# Altium PCB SuperMiniCar.PcbDoc
Units mm, origin at the board's own origin, x right, y up, seen from the top; angles counter-clockwise.
Board outline 97.78 x 108.4 mm, 2 copper layers (Top Layer, Bottom Layer); 77 components, 69 nets, 267 pads, 115 vias.
Unrouted connection lines stored in the file: 20.
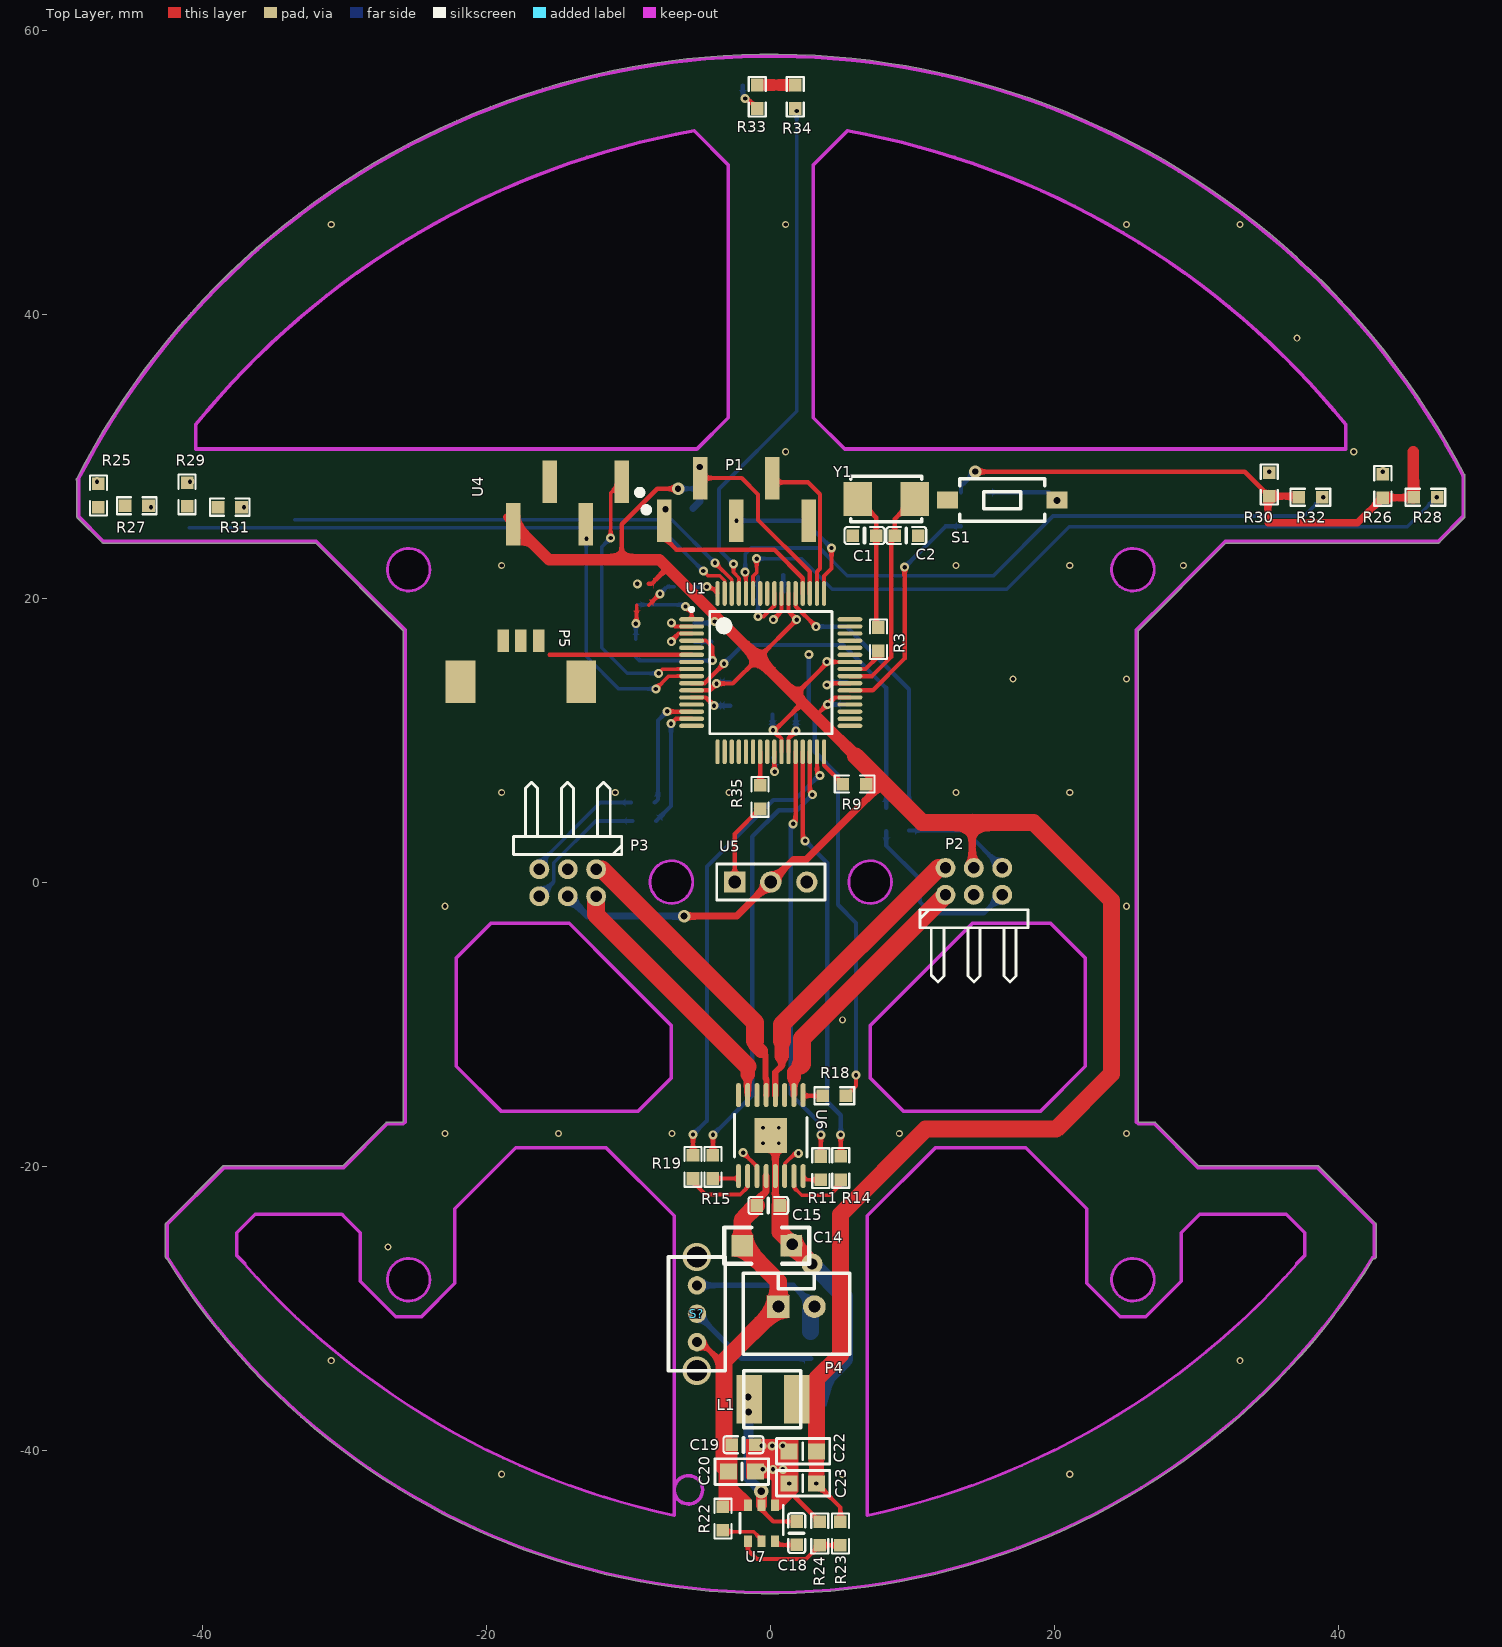
[diagram p0: Top Layer view]
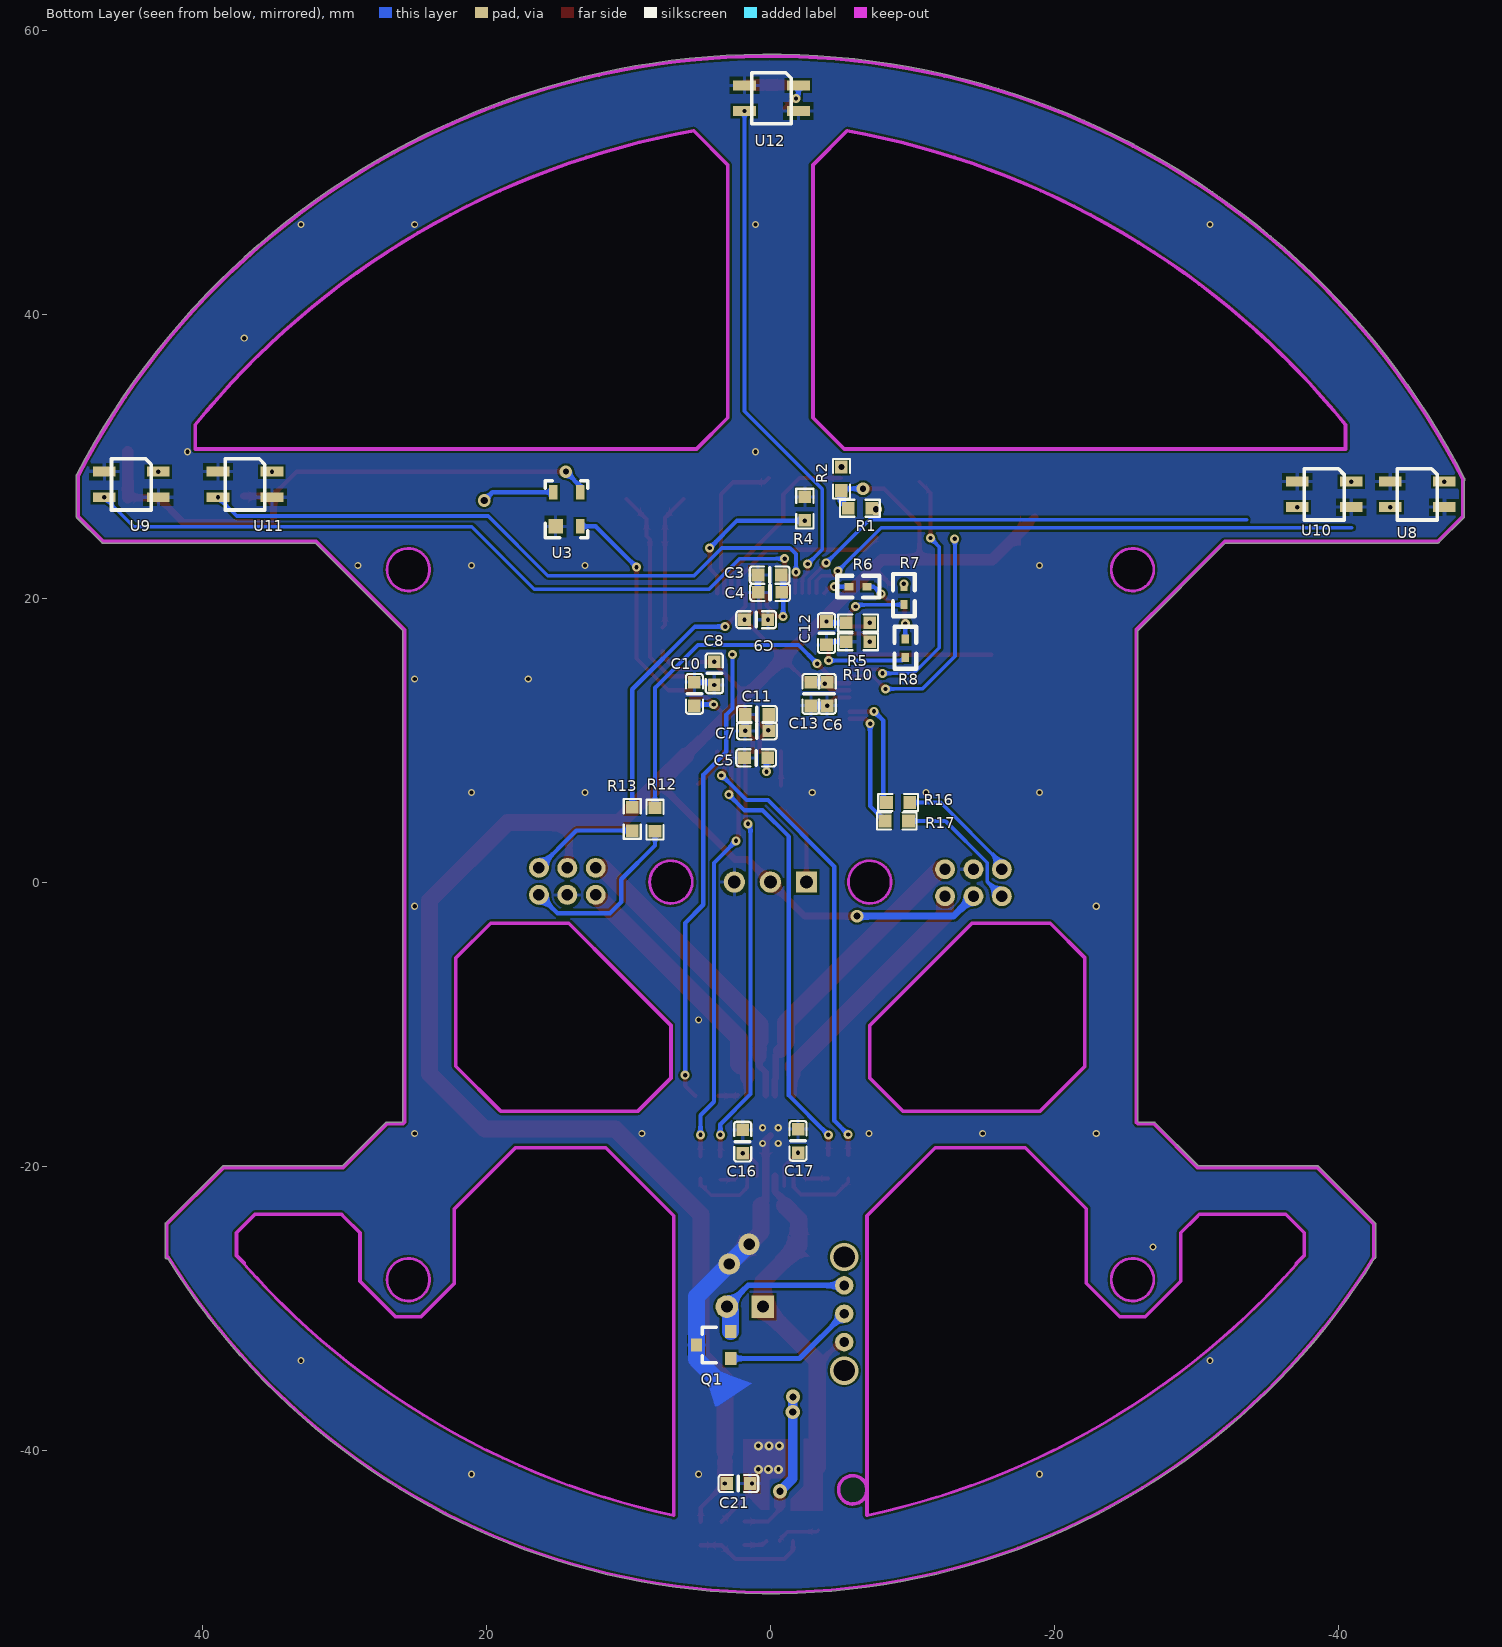
[diagram p1: Bottom Layer view, seen from below]
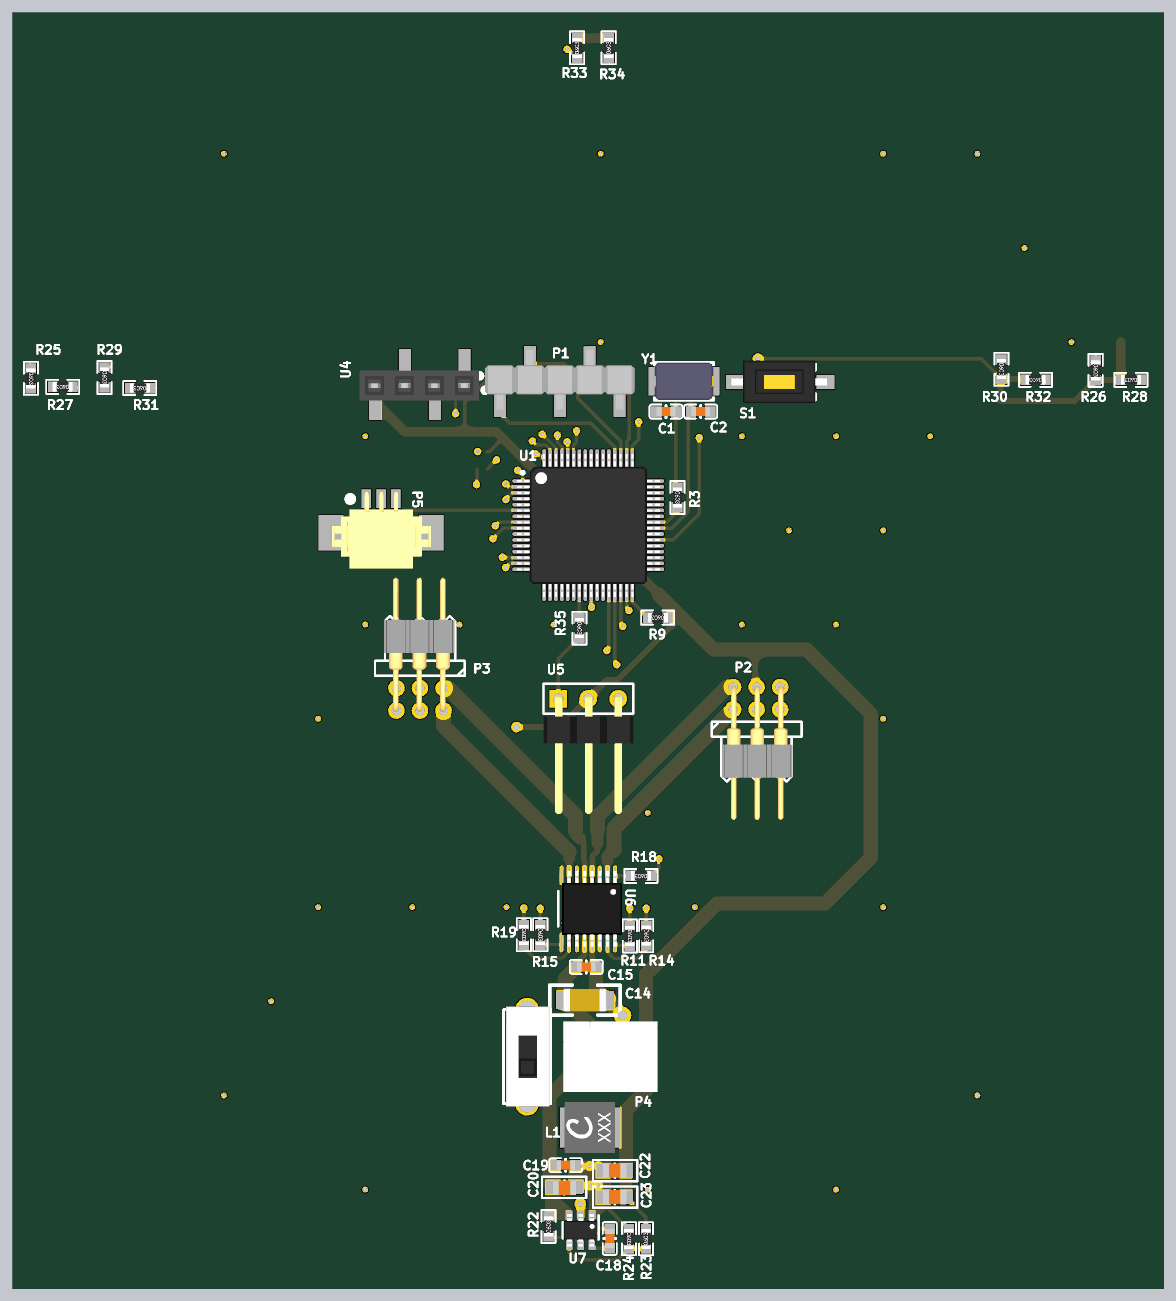
[diagram p2: 3D render of the assembled board from above, using the file's embedded part models]
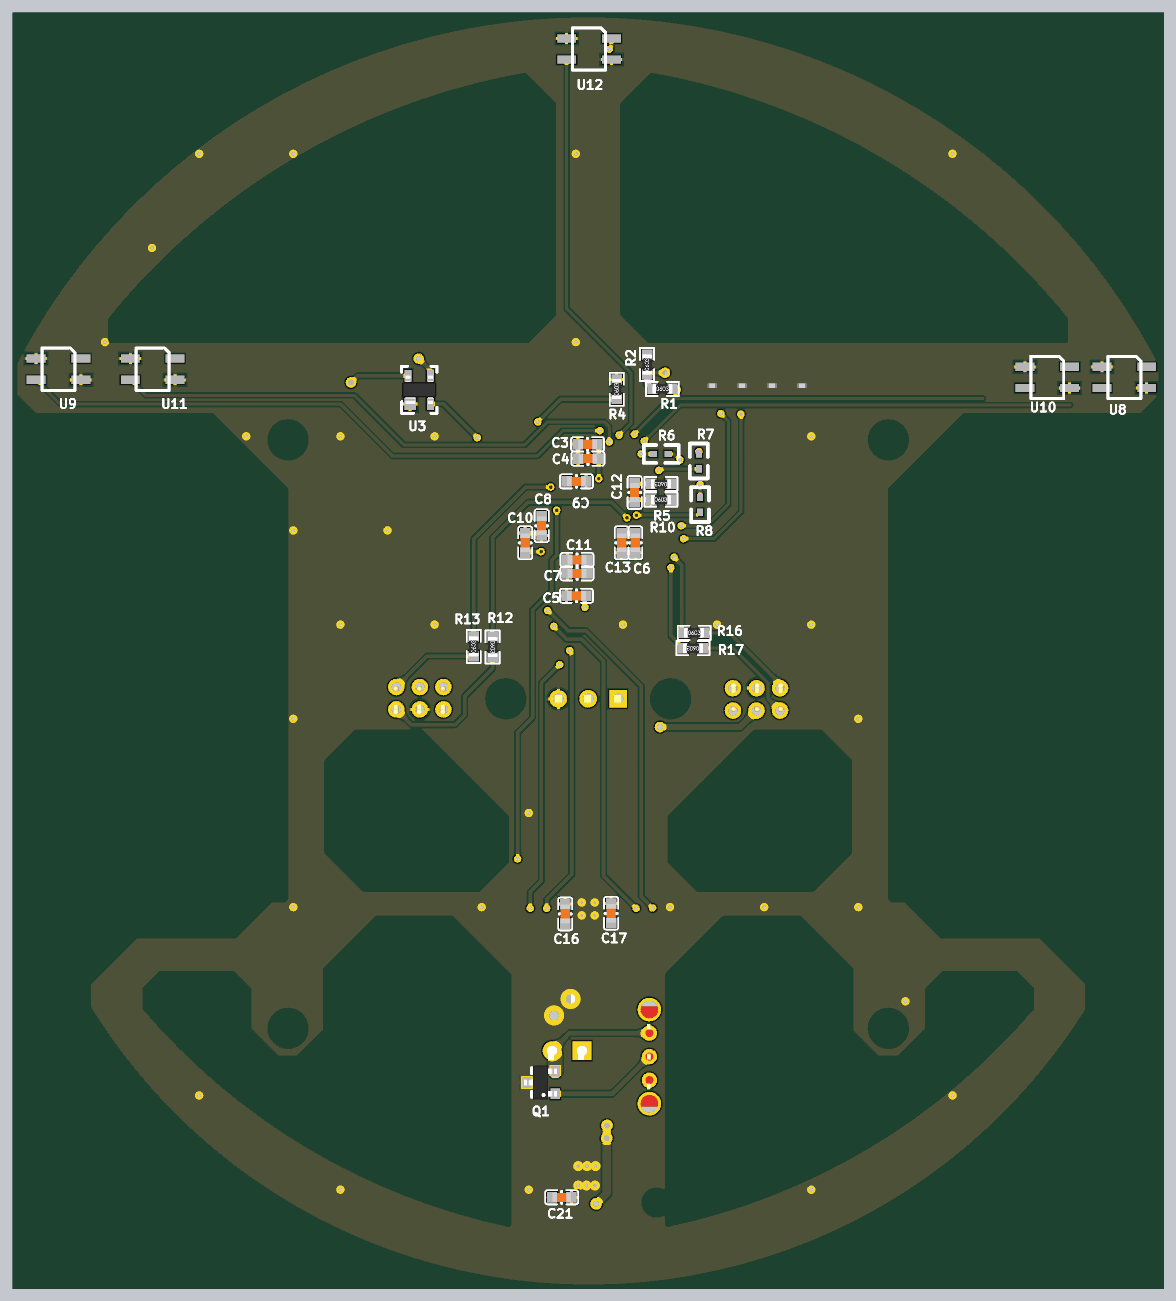
[diagram p3: 3D render of the assembled board from below, using the file's embedded part models]

## Layer stack, top to bottom
Top Solder: solder mask 0.0102, Solder Resist, Dk 3.5
Top Layer: signal copper 0.0356
Dielectric 1: dielectric 0.32, FR-4, Dk 4.8
Bottom Layer: signal copper 0.0356
Bottom Solder: solder mask 0.0102, Solder Resist, Dk 3.5

## Board outline
-42.627,-26.4 -42.627,-24.1 cw(c-42.5,-24.1) -42.59,-24.009 -42.59,-24.01 -38.59,-20.01 cw(c-38.5,-20.1) -38.5,-19.973 -30.128,-19.973 -27.09,-16.935 cw(c-27,-17.025) -27,-16.898 -25.928,-16.898 -25.877,-16.847 -25.877,17.697 -32.053,23.873 -47,23.873 cw(c-47,24) -47.091,23.91 -47.09,23.91 -48.84,25.66 -48.84,25.659 cw(c-48.75,25.75) -48.877,25.75 -48.877,28.26 cw(c-48.778,28.339) -48.891,28.397 cw(c0.058,3.272) 48.851,28.701 cw(c48.75,28.623) 48.877,28.623 48.877,25.75 cw(c48.75,25.75) 48.84,25.659 48.84,25.66 47.09,23.91 47.091,23.91 cw(c47,24) 47,23.873 32.053,23.873 25.877,17.697 25.877,-16.847 25.928,-16.898 27,-16.898 cw(c27,-17.025) 27.09,-16.935 30.128,-19.973 38.5,-19.973 cw(c38.5,-20.1) 38.59,-20.01 42.59,-24.01 42.59,-24.009 cw(c42.5,-24.1) 42.627,-24.1 42.627,-26.4 cw(c42.5,-26.4) 42.446,-26.516 cw(c-0.05,-0.055) -42.544,-26.52 cw(c-42.5,-26.4)
cut-out: -40.5,30.5 -40.5,32.207 cw(c4.87,-4.636) -5.4,52.9 -3,50.5 -3,32.7 -5.2,30.5
cut-out: 3,32.7 5.2,30.5 40.5,30.5 40.5,32.207 ccw(c-4.87,-4.636) 5.4,52.9 3,50.5
cut-out: 24,-28 ccw(c25.5,-28) 25.5,-29.5 ccw(c25.5,-28) 27,-28 ccw(c25.5,-28) 25.5,-26.5 ccw(c25.5,-28)
cut-out: 22.25,-28.25 24.6,-30.6 26.4,-30.6 28.9,-28.1 28.9,-24.7 30.2,-23.4 36.3,-23.4 37.6,-24.7 37.6,-26.3 37.04,-26.86 37.064,-26.885 cw(c-4.84,9.994) 6.8,-44.6 6.8,-23.5 11.6,-18.7 17.95,-18.7 22.25,-23
cut-out: -37.04,-26.86 -37.6,-26.3 -37.6,-24.7 -36.3,-23.4 -30.2,-23.4 -28.9,-24.7 -28.9,-28.1 -26.4,-30.6 -24.6,-30.6 -22.25,-28.25 -22.25,-23 -17.95,-18.7 -11.6,-18.7 -6.8,-23.5 -6.8,-44.6 cw(c4.84,9.994)
cut-out: -25.5,-29.5 cw(c-25.5,-28) -27,-28 cw(c-25.5,-28) -25.5,-26.5 cw(c-25.5,-28) -24,-28 cw(c-25.5,-28)
cut-out: 7,-13.8 9.325,-16.125 19,-16.125 22.15,-12.975 22.15,-5.35 19.7,-2.9 14.2,-2.9 7,-10.1
cut-out: -22.15,-12.975 -22.15,-5.35 -19.7,-2.9 -14.2,-2.9 -7,-10.1 -7,-13.8 -9.325,-16.125 -19,-16.125
cut-out: 24,22 ccw(c25.5,22) 25.5,20.5 ccw(c25.5,22) 27,22 ccw(c25.5,22) 25.5,23.5 ccw(c25.5,22)
cut-out: 5.47,0 ccw(c7,0) 7,-1.53 ccw(c7,0) 8.53,0 ccw(c7,0) 7,1.53 ccw(c7,0)
cut-out: -7,-1.503 cw(c-7,0) -8.503,0 cw(c-7,0) -7,1.503 cw(c-7,0) -5.497,0 cw(c-7,0)
cut-out: -25.5,20.5 cw(c-25.5,22) -27,22 cw(c-25.5,22) -25.5,23.5 cw(c-25.5,22) -24,22 cw(c-25.5,22)

## Design rules (kind name [scope] priority, off if disabled: settings)
Clearance [All] p1: gap=0.15
PolygonConnect PolygonConnect_1 [IsVia] p1: connectstyle=Direct reliefconductorwidth=0.254 reliefentries=4 polygonreliefangle="90 Angle" airgapwidth=0.254
PolygonConnect [All] p2: connectstyle=Relief reliefconductorwidth=0.254 reliefentries=4 polygonreliefangle="90 Angle" airgapwidth=0.254
RoomDefinition Sensor [InComponentClass('Sensor')] p1: confinementstyle=ConfineIn formatcopy=TRUE lockcomponents=FALSE outline -192,-72 158.7,-72 158.7,86.4 -192,86.4
RoomDefinition Power [InComponentClass('Power')] p2: confinementstyle=ConfineIn formatcopy=TRUE lockcomponents=FALSE outline -193.9,-75 122.1,-75 122.1,99 -193.9,99
RoomDefinition MotorDriver [InComponentClass('MotorDriver')] p3: confinementstyle=ConfineIn formatcopy=TRUE lockcomponents=FALSE outline -194.4,-84 96.9,-84 96.9,109.4 -194.4,109.4
RoomDefinition MCU [InComponentClass('MCU')] p4: confinementstyle=ConfineIn formatcopy=TRUE lockcomponents=FALSE outline -194.4,-80 236.9,-80 236.9,77.1 -194.4,77.1
RoutingVias [All] p1: holewidth=0.711 width=1.27 viastyle="Through Hole" minholewidth=0.711 minwidth=1.27 maxholewidth=0.711 maxwidth=1.27
SolderMaskExpansion [All] p1: expansion=0.102
Width [All] p1: maxlimit=2 minlimit=0.254 preferedwidth=0.254 minimp=50.000000 maximp=50.000000 favimp=50.000000
30 further rules are at their usual default settings.

## Classes and differential pairs
component class MCU: C1 C2 C3 C4 C5 C6 C7 C8 C9 C10 C11 C12 C13 P1 R1 R2 R3 R4 R5 R6 R7 R8 R9 R10 S1 U1 U3 U4 Y1
component class MotorDriver: C14 C15 C16 C17 P2 P3 R11 R12 R13 R14 R15 R16 R17 R18 R19 U6
component class Power: C18 C19 C20 C21 C22 C23 L1 P4 Q1 R22 R23 R24 S? U7
component class Sensor: P5 R25 R26 R27 R28 R29 R30 R31 R32 R33 R34 R35 U5 U8 U9 U10 U11 U12

## Components (designator, comment, footprint, x,y, rotation, side; value= is the part's Value field where it differs from the comment)
C1 "1uF/0603/50V" 0603C 6.6,24.4 r0 top
C2 "1uF/0603/50V" 0603C 9.55,24.4 r180 top
C3 "1uF/0603/50V" 0603C 0.05,21.625 r180 bottom
C4 "1uF/0603/50V" 0603C 0.025,20.4 r180 bottom
C5 "1uF/0603/50V" 0603C 1,8.75 r180 bottom
C6 "1uF/0603/50V" 0603C -4,13.25 r90 bottom
C7 "1uF/0603/50V" 0603C 0.95,10.65 r180 bottom
C8 "1uF/0603/50V" 0603C 3.95,14.7 r90 bottom
C9 "1uF/0603/50V" 0603C 1,18.475 r0 bottom
C10 "1uF/0603/50V" 0603C 5.35,13.25 r270 bottom
C11 "1uF/0603/50V" 0603C 0.95,11.8 r180 bottom
C12 "1uF/0603/50V" 0603C -3.95,17.525 r90 bottom
C13 "1uF/0603/50V" 0603C -2.85,13.25 r90 bottom
C14 "1uF/0603/50V" 1206 -2,-25.6 r0 top
C15 "1uF/0603/50V" 0603C -0.175,-22.775 r0 top
C16 "1uF/0603/50V" 0603C 1.95,-18.275 r90 bottom
C17 "1uF/0603/50V" 0603C -1.95,-18.225 r90 bottom
C18 "100nF" 0603C 1.825,-45.85 r90 top
C19 "100nF" 0603C -1.925,-39.625 r0 top
C20 "1uF/0603/50V" 0805 -2.025,-41.5 r180 top
C21 "100nF" 0603C 2.25,-42.35 r0 bottom
C22 "1uF/0603/50V" 0805 2.25,-40.1 r0 top
C23 "1uF/0603/50V" 0805 2.25,-42.35 r0 top
L1 "2.2uH" 4020L -1.15,-36.425 r0 top
P1 "TIVA C_Debug" SMT_HEADER5 -7.5,25.45 r0 top
P2 "Faulhaber_1524_L" HDR2X3_2.0Mm 14.3,0 r0 top
P3 "Faulhaber_1524_R" HDR2X3_2.0Mm -14.3,0 r180 top
P4 "Header 2" XH-2A 1.8,-29.9 r0 top
P5 "Header 3" A1.25WF-3P -17.6,17 r0 top
Q1 "NMOS_3p" SOT-23 2.8,-32.6 r90 bottom
R1 "1K/5%" 0603R -6.3,26.325 r180 bottom
R2 "1K/5%" 0603R -5,28.4 r90 bottom
R3 "1K/5%" 0603R 7.575,17.1 r270 top
R4 "1K/5%" 0603R -2.425,26.3 r90 bottom
R5 "1K/5%" 0603R -6.175,18.25 r0 bottom
R6 "1K/5%" 0402 -6.8,20.8 r0 bottom
R7 "1K/5%" 0402 -9.4,20.8 r270 bottom
R8 "1K/5%" 0402 -9.5,17.1 r270 bottom
R9 "1K/5%" 0603R 5.9,6.9 r180 top
R10 "1K/5%" 0603R -6.175,16.925 r180 bottom
R11 "33R" 0603R 3.525,-20.15 r270 top
R12 "1K/5%" 0603R 8.125,4.4 r270 bottom
R13 "510" 0603R 9.725,4.45 r90 bottom
R14 "33R" 0603R 4.925,-20.125 r270 top
R15 "33R" 0603R -4.075,-20.05 r270 top
R16 "1K/5%" 0603R -9,5.6 r180 bottom
R17 "1K/5%" 0603R -8.9,4.3 r0 bottom
R18 "1k" 0603R 4.475,-15.05 r180 top
R19 "33R" 0603R -5.475,-20.05 r270 top
R22 "10k" 0603R -3.375,-44.825 r90 top
R23 "54.9K" 0603R 4.9,-45.875 r90 top
R24 "1K" 0603R 3.45,-45.875 r270 top
R25 "220" 0603R -47.35,27.225 r270 top
R26 "220" 0603R 43.1,27.9 r270 top
R27 "7.5k" 0603R -44.65,26.5 r180 top
R28 "7.5k" 0603R 46.1,27.1 r180 top
R29 "220" 0603R -41.1,27.3 r270 top
R30 "220" 0603R 35.1,28 r270 top
R31 "7.5k" 0603R -38.1,26.4 r180 top
R32 "7.5k" 0603R 38,27.1 r180 top
R33 "220" 0603R -0.95,55.3 r90 top
R34 "7.5k" 0603R 1.725,55.3 r90 top
R35 "1K/5%" 0603R -0.75,6 r270 top
S1 "KEY" SW-3x6mm-SMT 16.3,26.9 r180 top
S? "slide switch" "Slide Switch" -5.2,-30.4 r90 top
U1 "TM4C123FH6PM" LQFP_64 0,14.75 r0 top
U3 "IMP811" SOT143 14.35,26.25 r180 bottom
U4 "Bluetooth" "SMT_Female HEADER4" -10.5,28.2 r180 top
U5 "Servo" HDR1X3 -2.54,0 r0 top
U6 "DRV8848PWP" HSSOP_N 0,-17.85 r270 top
U7 "TPS564201DDCR" SOT-23thin_L -0.65,-45.15 r270 top
U8 "ITR8307-TR8" SOP-4 -45.55,27.3 r0 bottom
U9 "ITR8307-TR8" SOP-4 45,28 r0 bottom
U10 "ITR8307-TR8" SOP-4 -39,27.3 r0 bottom
U11 "ITR8307-TR8" SOP-4 37,28 r0 bottom locked
U12 "ITR8307-TR8" SOP-4 -0.075,55.2 r0 bottom
Y1 "XTAL" NX5032GA 8.125,26.975 r180 top

## Footprints (in the part's own frame and the unit in brackets; to place one, negate y for a bottom-side part, rotate by r counter-clockwise, add the part's x,y. Pads: shape width x height; smd on the part's side, far side on the other; paste and mask are expansions set on the pad)
0402 [mil]
  rect 25x20 smd: 1(0,0) 2(50,0)
  silkscreen extent -35,-30 82,30
0603C [mil]
  rect 35x35 smd: 1(-32.5,0) 2(32.5,0)
  silkscreen extent -55,-24 55,24, body extent -31,-16 31,16, height 20
0603R [mil]
  rect 35x35 smd: 1(-32.5,0) 2(32.5,0)
  silkscreen extent -55,-24 55,24, body extent -33,-16 33,16, height 22
0805 [mm]
  rect 1.2x1.14 smd: 1(-0.955,0) 2(0.955,0)
  silkscreen extent -1.85,-0.89 1.91,0.91, body extent -1,-0.6 1,0.65, height 0.8
1206 [mil]
  rect 60x60 smd: 1(0,0) 2(135,0)
  silkscreen extent -50,-50 185,50, body extent -6,-38 140,38, height 69
4020L [mm]
  rect 1.8x3.4 smd: 1(-0.375,0) 2(2.975,0)
  silkscreen extent -0.75,-2 3.25,2, body extent -0.88,-2.15 3.42,2.15, height 2.1
A1.25WF-3P [mm]
  rect 2.1x3 smd: 0(-4.25,-2.9) 0(4.25,-2.9)
  round 1 on Top Overlay: 0(-2.625,-0.03)
  rect 0.8x1.6 smd: 1(-1.25,0) 2(0,0) 3(1.25,0)
  body extent -4.18,-5.93 4.23,0.58, height 3.58
HDR1X3 [mm] "Connector; Header; 3 Position"
  rect 1.5x1.5 hole 0.9: 1(0,0)
  round 1.5 hole 0.9: 2(2.54,0) 3(5.08,0)
  silkscreen extent -1.27,-1.27 6.35,1.27, body extent -1.25,-9.79 6.37,0.34, height 2.51
HDR2X3_2.0Mm [mm]
  round 1.4 hole 0.8: 1(-2,-0.9) 2(-2,1) 3(0,-0.9) 4(0,1) 5(2,-0.9) 6(2,1)
  silkscreen extent -3.8,-7.03 3.82,-1.95, body extent -2.95,-10.3 3.05,1.1, height 4
HSSOP_N [mm]
  oval 1.7x0.35 smd paste-0.102 mask+0.051: 1(-2.85,2.275) 2(-2.85,1.625) 3(-2.85,0.975) 4(-2.85,0.325) 5(-2.85,-0.325) 6(-2.85,-0.975) 7(-2.85,-1.625) 8(-2.85,-2.275) 9(2.85,-2.275) 10(2.85,-1.625) 11(2.85,-0.975) 12(2.85,-0.325) 13(2.85,0.325) 14(2.85,0.975) 15(2.85,1.625) 16(2.85,2.275)
  rect 2.46x2.31 smd paste-0.102 mask+0.051: 17(0,0)
  silkscreen extent -1.5,-2.55 1.5,2.55, body extent -3.2,-2.22 3.2,2.88, height 1.2
LQFP_64 [mm]
  oval 1.75x0.3 smd: 1(-5.575,3.75) 2(-5.575,3.25) 3(-5.575,2.75) 4(-5.575,2.25) 5(-5.575,1.75) 6(-5.575,1.25) 7(-5.575,0.75) 8(-5.575,0.25) 9(-5.575,-0.25) 10(-5.575,-0.75) 11(-5.575,-1.25) 12(-5.575,-1.75) 13(-5.575,-2.25) 14(-5.575,-2.75) 15(-5.575,-3.25) 16(-5.575,-3.75) 33(5.575,-3.75) 34(5.575,-3.25) 35(5.575,-2.75) 36(5.575,-2.25) 37(5.575,-1.75) 38(5.575,-1.25) 39(5.575,-0.75) 40(5.575,-0.25) 41(5.575,0.25) 42(5.575,0.75) 43(5.575,1.25) 44(5.575,1.75) 45(5.575,2.25) 46(5.575,2.75) 47(5.575,3.25) 48(5.575,3.75)
  oval 0.3x1.75 smd: 17(-3.75,-5.575) 18(-3.25,-5.575) 19(-2.75,-5.575) 20(-2.25,-5.575) 21(-1.75,-5.575) 22(-1.25,-5.575) 23(-0.75,-5.575) 24(-0.25,-5.575) 25(0.25,-5.575) 26(0.75,-5.575) 27(1.25,-5.575) 28(1.75,-5.575) 29(2.25,-5.575) 30(2.75,-5.575) 31(3.25,-5.575) 32(3.75,-5.575) 49(3.75,5.575) 50(3.25,5.575) 51(2.75,5.575) 52(2.25,5.575) 53(1.75,5.575) 54(1.25,5.575) 55(0.75,5.575) 56(0.25,5.575) 57(-0.25,5.575) 58(-0.75,5.575) 59(-1.25,5.575) 60(-1.75,5.575) 61(-2.25,5.575) 62(-2.75,5.575) 63(-3.25,5.575) 64(-3.75,5.575)
  silkscreen extent -5.7,-4.3 4.3,4.57, body extent -6.07,-6.08 6.07,6.06, height 1.62
NX5032GA [mm] "贴片晶振，5mm x 3.2mm"
  rect 2x2.4 smd: 1(-2,0) 2(2,0)
  silkscreen extent -2.5,-1.6 2.5,1.6, body extent -2.5,-1.6 2.5,1.6, height 1.3
"Slide Switch" [mm]
  round 1.3 hole 0.7: 1(-2,0) 2(0,0) 3(2,0)
  silkscreen extent -4,-2 4,2, body extent -4.25,-1.9 4.25,1.8, height 6.5
"SMT_Female HEADER4" [mm]
  rect 1.02x3 smd: 1(0,0) 2(2.54,3) 3(5.08,0) 4(7.62,3)
  silkscreen extent -1.47,0.56 -1.07,0.96, body extent -1.23,0.33 8.93,2.87, height 8.5
SMT_HEADER5 [mm]
  rect 1.02x3 smd: 1(0,0) 2(2.54,3) 3(5.08,0) 4(7.62,3) 5(10.16,0)
  silkscreen extent -1.47,0.56 -1.07,0.96, body extent -1.27,-0.89 11.43,4.19, height 10.2
SOP-4 [mm]
  rect 1.6x0.7 smd: 1(1.9,-0.9) 2(-1.9,-0.9) 3(1.9,0.9) 4(-1.9,0.9)
  silkscreen extent -1.4,-1.8 1.4,1.8
SOT143 [mm]
  rect 1x1 smd: 1(-0.77,-1.2)
  rect 0.6x1 smd: 2(0.95,-1.2) 3(0.95,1.2) 4(-0.95,1.2)
  silkscreen extent -1.5,-2 1.5,2, body extent -1.46,-1.21 1.46,1.21, height 1
SOT-23 [mm]
  rect 0.9x0.8 smd: 1(-0.95,0) 2(0.95,0) 3(0,2.4)
  silkscreen extent -1.25,1 1.25,2, body extent -1.45,-0.15 1.45,2.65, height 1.3
SOT-23thin_L [mm]
  rect 0.8x0.55 smd paste+0 mask+0.051: 1(-1.275,0.95) 2(-1.275,0) 3(-1.275,-0.95) 4(1.275,-0.95) 5(1.275,0) 6(1.275,0.95)
  silkscreen extent -1.27,-1.52 0.78,1.52, body extent -1.4,-1.45 1.4,1.45, height 1.45
SW-3x6mm-SMT [mm] "两脚贴片轻触开关3x6mm"
  rect 1.5x1.2 smd: 1(-3.85,0) 2(3.85,0)
  silkscreen extent -3,-1.5 3,1.5, body extent -4,-1.83 4.15,1.77, height 2.49
XH-2A [mm] "2A,2.54mm"
  rect 1.6x1.6 hole 0.85: 1(-1.27,0)
  round 1.6 hole 0.85: 2(1.27,0)
  silkscreen extent -3.75,-3.35 3.75,2.35, body extent -3.92,-3.52 4.07,2.48, height 7

## Part data
C1 C2 C3 C4 C5 C6 C7 C8 C9 C10 C11 C12 C13 C14 C15 C16 C17 C18 C19 C20 C21 C22 C23: library part Cap, "Capacitor"
L1: library part Inductor, "Inductor"
P2 P3: library part Faulhaber_1524
P4: "Header, 2-Pin"
P5: "Header, 3-Pin"
Q1: "N-Channel Power MOSFET"
R1 R2 R3 R4 R5 R6 R7 R8 R9 R10 R11 R12 R13 R14 R15 R16 R17 R18 R19 R22 R23 R24 R25 R26 R27 R28 R29 R30 R31 R32 R33 R34 R35: library part Res1, "Resistor"
S1: library part PushButton_2p, "Button"
U3: "复位芯片"
U4: "Bluetooth Module"
U6 U7: "Imported"
Y1: "Crystal Oscillator"

## Via types
v1: diameter 0.635, hole 0.305, Top Layer to Bottom Layer, 66 vias
v2: diameter 0.5, hole 0.3, Top Layer to Bottom Layer, 32 vias
v3: diameter 0.889, hole 0.432, Top Layer to Bottom Layer, 4 vias
v4: diameter 0.508, hole 0.254, Top Layer to Bottom Layer, 4 vias
v5: diameter 1, hole 0.5, Top Layer to Bottom Layer, 3 vias
v6: diameter 2, hole 1.5, Top Layer to Bottom Layer, 2 vias
v7: diameter 1.5, hole 0.8, Top Layer to Bottom Layer, 2 vias
v8: diameter 0.9, hole 0.5, Top Layer to Bottom Layer, 2 vias

## Nets (pads, with @x,y where several pads share a name; then routed paths per layer and width w, separated by ;. In a path a pad name is that pad's centre, name@x,y a point inside that pad or via, vN(x,y) a via of type N, cw(c..) or ccw(c..) an arc to the next point about the centre after c; other vN are vias at no path point)
3V3: C6.2 C7.2 C8.2 C9.2 C10.2 C11.2 C12.2 C13.2 C21.2 C22.2 C23.2 L1.2 P2.4 P3.4 P5.1 R1.1 R2.1 R5.2 R9.1 R18.1 R23.2 R25.2 R26.2 R27.2 R28.2 R29.2 R30.2 R31.2 R32.2 R33.2 R34.2 U1.11 U1.26 U1.37 U1.42 U1.54 U3.3 U4.4 U5.2 | length 227.5
  Top Layer w0.3: -10.5,22.7 -10.5,25.2 -8,27.7 v3(-6.525,27.7) ; -8.6,21 -8.41,21 -7.275,22.135 ; U1.11 -4.3,13.5 v1(-3.825,13.975) -2.674,13.975 -0.895,15.755 v1(1.826,18.475) 1.25,19.051 U1.54 ; U1.26 0.75,10.1 v1(0.15,10.7) 0.31,10.7 2.235,12.625 ; 1.7,13.16 3.95,15.41 v1(3.95,15.526) 3.975,15.5 U1.42 ; 3.18,11.68 3.18,11.72 3.96,12.5 v1(4,12.5) 4.5,13 U1.37 ; v1(3.205,-42.35) 4.9,-44.045 R23.2 ; v3(14.4,28.9) 33.375,28.9 R30.2
  Top Layer w0.5: R25.2 R25.2@-47.25,26.5 ; U4.4@-18.62,25.7 U4.4 ; v8(-6.1,-2.4) -2.4,-2.4 U5.2 1.6,1.6 2.5,1.6 7.86,6.96 ; 14.18,4.2 14.18,1.12 P2.4 ; R32.2@37.1,27.174 R30.2 35,27.075 35,25.3 41.325,25.3 R26.2 R28.2@45.249,27.075
  Top Layer w0.8: U4.4 -15.62,22.7 -10.5,22.7 -7.84,22.7 -7.275,22.135 -0.895,15.755 1.7,13.16 2.235,12.625 3.18,11.68 5.98,8.88 ; R33.2 R34.2 ; R28.2@45.249,27.075 45.25,30.3
  Top Layer w1: v1(3.205,-42.35) C22.2
  Top Layer w1.2: C22.2 3.205,-34.995 4.9,-33.3 4.9,-23.4 10.9,-17.4 20.1,-17.4 24,-13.5 24,-1.3 18.5,4.2 14.18,4.2 10.66,4.2 7.86,7 ; 5.98,8.88 7.86,7 ; 7.86,6.96 7.86,7
  Bottom Layer w0.3: v3(-6.525,27.7) R2.1@-5.126,27.7 ; R5.2 C12.2@-4.05,18.25 ; v1(-3.825,13.975) -3.725,14.075 C13.2 ; C7.2@0.125,10.725 C11.2 ; v1(4,12.5) C10.2@5.274,12.5 ; U3.3 13.4,27.9 v3(14.4,28.9)
  Bottom Layer w0.5: P3.4 -12.9,-2.4 v8(-6.1,-2.4) ; R1.1 -5,26.799 R2.1 R2.1@-5.126,27.7
  other v1: -3.95,18.35
7V4: C14.1 C15.1 C19.1 C20.2 P4.1 R22.2 S?.1 U6.12 U7.3 | length 26.7
  Top Layer w0.3: S?.1 -4.9,-32.4 -3.3,-34
  Top Layer w0.5: C15.1@-0.925,-22.926 -0.925,-22.375 -0.331,-21.78 -0.331,-20.706 U6.12
  Top Layer w1.2: -3.3,-34 -3.3,-41.18 C20.2 ; -3.3,-33.73 P4.1 0.53,-28.13 C14.1 -2,-23.775 C15.1
AIN1: R11.2 U6.16 | length 1.4
  Top Layer w0.254: U6.16 2.551,-20.976 R11.2
AIN2: R14.2 U6.15 | length 5.1
  Top Layer w0.254: U6.15 1.625,-21.5 2.175,-22.05 4.175,-22.05 4.925,-21.3 R14.2@4.925,-20.876
BIN1: R15.2 U6.9 | length 1.9
  Top Layer w0.254: R15.2 -2.451,-20.876 U6.9
BIN2: R19.2 U6.10 | length 5.5
  Top Layer w0.254: R19.2 -5.475,-21.125 -4.6,-22 -2.15,-22 -1.625,-21.475 U6.10
GND: C1.1 C2.1 C3.1 C4.1 C5.1 C6.1 C7.1 C8.1 C9.1 C10.1 C11.1 C12.1 C13.1 C14.2 C15.2 C16.2 C17.2 C19.2 C20.1 C21.1 C22.1 C23.1 P1.5 P2.3 P3.3 P5.2 Q1.3 R4.2 R10.1 R24.1 S1.2 U1.12 U1.27 U1.39 U1.55 U3.1 U4.3 U5.3 U6.3 U6.6 U6.13 U6.17 U7.1 U8.1 U8.4 U9.1 U9.4 U10.1 U10.4 U11.1 U11.4 U12.1 U12.4 | length 38.9
  Top Layer w0.3: U1.12 -4.576,13 v1(-4,12.425) ; v1(0.175,18.475) 0.75,19.05 U1.55 ; U1.27 1.25,10.124 v1(1.776,10.65) ; 1.55,-43.1 1.55,-43.149 R24.1 ; v1(3.95,13.875) 4.076,14 U1.39
  Top Layer w0.5: U6.17 0.325,-18.175 U6.13 0.325,-22.45 C15.2
  Top Layer w1.2: C15.2 0.65,-24.65 v7(2.9,-26.9)
  Bottom Layer w0.3: R10.1 C12.1@-4.176,16.925 ; v1(-4,12.425) C13.1 ; C4.1@0.875,20.425 C3.1 ; v1(1.776,10.65) C11.1 ; v1(3.95,13.875) 4.151,14.075 C10.1
  Bottom Layer w1.2: v7(1.5,-25.5) v7(2.9,-26.9) 5.2,-29.2 Q1.3 5.2,-33.6 3.2,-35.6
  other v1: 1.295,-42.35 -0.575,-41.35 0.15,-41.35 0.85,-41.35 -0.625,-39.7 0.1,-39.7 0.85,-39.7
  other v2: -18.95,-41.7 5.05,-41.7 21.05,-41.7 -30.95,-33.7 33.05,-33.7 -26.95,-25.7 -22.95,-17.7 -14.95,-17.7 -6.95,-17.7 9.05,-17.7 25.05,-17.7 5.05,-9.7 -22.95,-1.7 25.05,-1.7 -18.95,6.3 -10.95,6.3 -2.95,6.3 13.05,6.3 21.05,6.3 17.05,14.3 25.05,14.3 -18.95,22.3 13.05,22.3 21.05,22.3 29.05,22.3 1.05,30.3 41.05,30.3 37.05,38.3 -30.95,46.3 1.05,46.3 25.05,46.3 33.05,46.3
  other v4: -0.55,-18.4 0.55,-18.4 -0.55,-17.3 0.55,-17.3
LED1: R6.2 U1.64 | length 2
  Top Layer w0.254: v1(-4.5,20.8) -4.225,20.8 U1.64
  Bottom Layer w0.254: R6.2 v1(-4.5,20.8)
LED2: R7.2 U1.1 | length 4.5
  Top Layer w0.254: v1(-6,19.4) -5.575,18.975 U1.1
  Bottom Layer w0.254: R7.2 -6.13,19.53 v1(-6,19.4)
LED3: R8.2 U1.4 | length 8.1
  Top Layer w0.254: U1.4 -4.55,17 -4.1,16.55 v1(-4.1,15.6)
  Bottom Layer w0.254: R8.2 -9.27,15.6 v1(-4.1,15.6)
LED4: U1.44
LED5: U1.45
LMOTO+: P2.2 U6.4 | length 21.3
  Top Layer w0.45: U6.4 0.325,-13.4 0.775,-12.95 0.775,-12.263
  Top Layer w1: 0.775,-12.263 0.775,-11.2
  Top Layer w1.27: 0.775,-11.2 0.775,-10.025 11.8,1 P2.2
LMOTO-: P2.1 U6.2 | length 18.5
  Top Layer w0.45: U6.2 1.625,-13.75
  Top Layer w1: 1.625,-13.75 1.625,-13.37 2.095,-12.9
  Top Layer w1.27: 2.095,-12.9 2.195,-12.8 2.195,-11.005 P2.1
NetC1_2: C1.2 R3.1 Y1.2 | length 9.7
  Top Layer w0.3: Y1.2 7.425,25.675 C1.2 7.425,18.1 R3.1@7.6,17.925
NetC2_2: C2.2 U1.40 Y1.1 | length 15.2
  Top Layer w0.3: U1.40 7.125,14.5 8.475,15.85 8.475,24.125 C2.2@8.725,24.375 ; C2.2 8.725,25.575 Y1.1
NetC3_2: C3.2 C4.2 C5.2 U1.25 U1.56 | length 7.5
  Top Layer w0.3: v1(-0.9,18.7) -0.514,18.7 0.2,19.414 0.2,19.425 ; U1.25 0.25,7.8 v1(0.275,7.775) ; U1.56@0.25,19.464 U1.56
  Bottom Layer w0.3: v1(-0.9,18.7) C3.2@-0.9,21.501 ; C5.2 0.275,8.65 v1(0.275,7.775)
NetC16_1: C16.1 U6.14 | length 2.2
  Top Layer w0.254: U6.14 0.975,-19.825 1.7,-19.101 v1(1.95,-19.101)
NetC17_1: C17.1 U6.11 | length 2.8
  Top Layer w0.254: v1(-1.95,-19.051) -1.95,-19.061 -0.975,-20.036 U6.11 U6.11@-0.975,-21.4
NetC18_1: C18.1 U7.6 | length 1.6
  Top Layer w0.3: U7.6 0.55,-46.675 C18.1
NetC18_2: C18.2 L1.1 U7.2 | length 11.2
  Top Layer w0.3: U7.2 -0.65,-44.2 0.175,-45.024 C18.2
  Top Layer w0.8: v5(-0.675,-42.9) -0.65,-42.925 U7.2
  Bottom Layer w0.7: v5(-1.6,-36.25) -1.575,-36.275 v5(-1.575,-37.325) -1.575,-42 v5(-0.675,-42.9)
NetP2_5: P2.5 R12.2 | length 12.6
  Bottom Layer w0.3: R12.2 8.125,2.575 10.5,0.2 10.5,-1.4 11.3,-2.2 15,-2.2 P2.5
NetP2_6: P2.6 R13.1 | length 7.7
  Bottom Layer w0.3: R13.1 13.675,3.625 P2.6
NetP3_5: P3.5 R16.2 | length 8.7
  Bottom Layer w0.254: P3.5 -16.3,1.3 -12,5.6 R16.2
NetP3_6: P3.6 R17.1 | length 9.9
  Bottom Layer w0.254: P3.6 -15.277,0.023 -15.277,1.352 -12.329,4.3 R17.1
  Bottom Layer w0.3: P3.6 P3.6@-16.3,-0.6
NetP4_2: P4.2 Q1.2 S?.3 | length 10.8
  Bottom Layer w0.381: S?.3 1.57,-28.4 P4.2
  Bottom Layer w1.2: Q1.2 2.8,-30.17 P4.2
NetP5_3: P5.3 U1.6 | length 10
  Top Layer w0.3: -15.576,16 U1.6
NetQ1_1: Q1.1 S?.2 | length 9.3
  Bottom Layer w0.381: S?.2 -2.05,-33.55 Q1.1
NetR3_2: R3.2 U1.41 | length 2.7
  Top Layer w0.3: U1.41 6.675,15 7.575,15.9 R3.2
NetR5_1: R5.1 U1.2 | length 1.5
  Top Layer w0.3: v1(-7,18.25) -6.751,18 U1.2
NetR6_1: R6.1 | length 2.3
  Top Layer w0.254: -8.6,19.5 v1(-7.8,20.3)
  Bottom Layer w0.254: v1(-7.8,20.3) -7.3,20.8 R6.1
NetR7_1: R7.1
  other v1: -9.4,21
NetR8_1: R8.1 | length 2.4
  Top Layer w0.254: v1(-9.5,18.2) -9.45,18.25 -9.45,19.5
  Bottom Layer w0.254: R8.1 v1(-9.5,18.2)
NetR9_2: R9.2 U1.32 | length 2.8
  Top Layer w0.3: U1.32 3.75,8.225 R9.2
NetR10_2: R10.2 U1.3 | length 1.7
  Top Layer w0.3: v1(-7,16.925) -7,17 -6.5,17.5 U1.3
NetR18_2: R18.2 U6.1 | length 1.4
  Top Layer w0.3: U6.1 2.325,-15.05 R18.2
NetR22_1: R22.1 U7.5 | length 3.1
  Top Layer w0.254: R22.1 -3.277,-45.748 -1.21,-45.748 -0.65,-46.308 U7.5
NetR23_1: R23.1 R24.2 U7.4 | length 7.8
  Top Layer w0.3: U7.4 -1.6,-47.05 -0.975,-47.675 2.476,-47.675 R24.2 R23.1
NetR25_1: R25.1 U8.2
  other v1: -47.45,28.2
NetR26_1: R26.1 U9.2
  other v1: 43.1,28.9
NetR27_1: R27.1 U1.63 U8.3 | length 40.1
  Top Layer w0.254: v1(-4.75,21.9) -4.425,21.575 -3.6,21.575 -3.25,21.225 U1.63
  Bottom Layer w0.254: -40.95,24.95 -7.8,24.95 v1(-4.75,21.9)
  other v1: -43.65,26.4
NetR28_1: R28.1 U1.59 U9.3 | length 54
  Top Layer w0.254: U1.59 -1.25,21.534 -1,21.784 v1(-1,22.775)
  Bottom Layer w0.254: v1(-1,22.775) 2.175,22.775 4.325,20.625 16.625,20.625 21.025,25.025 44.825,25.025 v1(46.9,27.1)
NetR29_1: R29.1 U10.2
  other v1: -40.9,28.2
NetR30_1: R30.1 U11.2
  other v1: 35.1,28.9
NetR31_1: R31.1 U1.62 U10.3 | length 33.5
  Top Layer w0.254: v1(-3.925,22.475) -2.75,21.3 U1.62
  Bottom Layer w0.254: -33.525,25.525 -6.975,25.525 v1(-3.925,22.475)
  other v1: -37.1,26.4
NetR32_1: R32.1 U1.60 U11.3 | length 46.8
  Top Layer w0.254: v1(-1.8,21.825) -1.75,21.775 U1.60
  Bottom Layer w0.254: v1(-1.8,21.825) -1.8,23.1 -1.375,23.525 3.434,23.525 5.379,21.581 15.68,21.581 19.875,25.775 37.575,25.775 v1(38.9,27.1)
NetR33_1: R33.1 U12.2 | length 2.1
  Top Layer w0.3: v1(-1.8,55.175) -1.65,55.175 R33.1
  Bottom Layer w0.3: U12.2 -1.975,55.35 v1(-1.8,55.175)
NetR34_1: R34.1 U1.61 U12.3 | length 36.8
  Top Layer w0.254: v1(-2.625,22.4) -2.625,21.809 -2.25,21.434 U1.61
  Bottom Layer w0.254: v1(-2.625,22.4) -3.65,23.425 -3.65,27.675 1.825,33.15 v1(1.825,54.3)
NetR35_2: R35.2 U5.1 | length 5.9
  Top Layer w0.3: U5.1 -2.54,3.385 R35.2
NetS1_1: S1.1 U3.4 | length 5.1
  Bottom Layer w0.3: U3.4 19.575,27.45 v8(20.15,26.875)
NetU1_46: U1.46
NRST: U1.38 U3.2 | length 16.4
  Top Layer w0.3: U1.38 7.175,13.5 9.425,15.75 v1(9.425,22.175)
  Bottom Layer w0.3: v1(9.425,22.175) 12.3,25.05 U3.2
PC5/ENCORDER2_A: R17.2 U1.15 | length 8.9
  Top Layer w0.3: v1(-7.025,11.15) -6.675,11.5 U1.15
  Bottom Layer w0.3: R17.2 -7.025,5.349 v1(-7.025,11.15)
PC6/ENCORDER2_B: R16.1 U1.14 | length 8.5
  Top Layer w0.3: v1(-7.3,12.025) -7.275,12 U1.14
  Bottom Layer w0.3: R16.1 -7.95,5.824 -7.95,11.375 v1(-7.3,12.025)
PD6/ENCORDER1_A: R13.2 U1.53 | length 19.6
  Top Layer w0.3: U1.53 1.75,19.425 v1(3.187,17.988)
  Bottom Layer w0.3: v1(3.187,17.988) 5.313,17.988 9.725,13.575 R13.2
PD7/ENCORDER1_B: R12.1 U1.10 | length 24.5
  Top Layer w0.3: U1.10 -4.673,14 v1(-3.298,15.375)
  Bottom Layer w0.3: v1(-3.298,15.375) -1.973,16.7 5.1,16.7 8.125,13.675 R12.1
PF0/MIPWM4/LMOTO_INN: R11.1 U1.28 | length 29.5
  Top Layer w0.3: v1(1.575,4.1) 1.75,4.275 U1.28 ; R11.1 v1(3.525,-17.8)
  Bottom Layer w0.3: v1(1.575,4.1) 1.4,3.925 1.4,-14.925 3.525,-17.05 v1(3.525,-17.8)
PF1/MIPWM5/LMOTO_INP: R14.1 U1.29 | length 29.6
  Top Layer w0.3: U1.29 2.25,3.075 v1(2.425,2.9) ; R14.1 v1(4.925,-17.8)
  Bottom Layer w0.3: v1(2.425,2.9) 3.975,1.35 3.975,-15.475 4.925,-16.425 v1(4.925,-17.8)
PF2/MIPWM6/RMOTO_INN: R15.1 U1.30 | length 32.1
  Top Layer w0.3: R15.1 v1(-4.075,-17.8) ; U1.30 2.75,6.325 v1(2.925,6.15)
  Bottom Layer w0.3: v1(-4.075,-17.8) -1.3,-15.025 -1.3,3.2 0.563,5.062 0.575,5.05 1.825,5.05 v1(2.925,6.15)
PF3/MIPWM7/RMOTO_INP: R19.1 U1.31 | length 33.1
  Top Layer w0.3: R19.1 v1(-5.475,-17.775) ; U1.31 3.25,7.7 v1(3.45,7.5)
  Bottom Layer w0.3: v1(-5.475,-17.775) -4.5,-16.8 -4.5,1.1 0.175,5.775 1.677,5.775 3.402,7.5 v1(3.45,7.5)
RMOTO+: P3.2 U6.7 | length 18.4
  Top Layer w0.45: U6.7 -1.625,-13.55
  Top Layer w1: -1.625,-13.55 -1.625,-12.975
  Top Layer w1.27: P3.2 -12.3,-2.3 -1.625,-12.975
RMOTO-: P3.1 U6.5 | length 21.1
  Top Layer w0.45: -0.688,-11.888 -0.375,-12.2 -0.375,-13.825 -0.3,-13.9 -0.3,-14.975 U6.5
  Top Layer w1: -1.1,-11.2 -1.1,-11.475 -0.688,-11.888
  Top Layer w1.27: P3.1 -11.9,0.9 -1.1,-9.9 -1.1,-11.2
RXD: U1.9 U4.2 | length 17
  Top Layer w0.254: v1(-8.1,13.6) -7.2,14.5 U1.9
  Bottom Layer w0.254: v1(-12.975,24.175) -13,24.15 -13,15.9 -10.7,13.6 v1(-8.1,13.6)
SERVO: R35.1 U1.23 | length 2.3
  Top Layer w0.3: R35.1 U1.23
TCLK: P1.1 R1.2 U1.52 | length 12
  Top Layer w0.3: P1.1@-7.5,24.25 -6.65,23.4 0.25,23.4 2.25,21.4 U1.52
  other v3: -7.425,26.25
TDI: P1.4 U1.50 | length 10.9
  Top Layer w0.3: P1.4 0.42,28.15 2.625,28.15 3.47,27.305 3.47,22.07 3.25,21.85 U1.50
TDO: P1.3 R4.1 U1.49 | length 10.9
  Top Layer w0.3: U1.49 3.75,21.55 4.275,22.075 v1(4.275,23.525)
  Bottom Layer w0.3: v1(-2.42,25.45) 2.35,25.45 v1(4.275,23.525)
TMS: P1.2 R2.2 U1.51 | length 13
  Top Layer w0.3: P1.2 -2.05,28.45 -0.9,27.3 -0.9,25.5 2.75,21.85 U1.51
  other v3: -5,29.225
TXD: U1.8 U4.1 | length 19.5
  Top Layer w0.254: v1(-11.275,24.225) -11.275,27.425 U4.1 ; v1(-7.9,14.7) -7.6,15 U1.8
  Bottom Layer w0.254: v1(-11.275,24.225) -11.9,23.6 -11.9,16.5 -10.1,14.7 v1(-7.9,14.7)
pads on no net: P5.0 U1.5 U1.7 U1.13 U1.16 U1.17 U1.18 U1.19 U1.20 U1.21 U1.22 U1.24 U1.33 U1.34 U1.35 U1.36 U1.43 U1.47 U1.48 U1.57 U1.58 U6.8
copper on no net: | length 32.7
  Top Layer w0.3: 5.3,-15.05 6,-14.35 v1(6,-13.6)
  Bottom Layer w0.3: v1(2.675,16.025) 2.675,12.225 3.1,11.8 3.1,9.175 4.725,7.55 4.725,-1.6 6,-2.875 v1(6,-13.6)
  other v6: -5.2,-34.4 -5.2,-26.4

## Polygon pours and split planes (outlines as drawn)
GND on Bottom Layer "GND" (solid, remove dead copper, pour order 6): -43.5,-28.2 -19.1,-52.6 21,-52.6 21,-52.1 52.8,-20.3 53.9,-19.2 53.9,66.2 -52.8,66.2 -53.1,65.9 -53.4,65.6 -53.4,-18.1
GND on Bottom Layer "GND" (solid, remove dead copper, pour order 2): -4.5,-45.775 -2.425,-47.85 4.3,-47.85 5.175,-47.85 5.875,-47.15 5.875,-44.475 4.525,-43.125 3.9,-42.5 3.9,-35.1 -4.5,-35.1 -4.5,-44.65

## Keep-outs
Keep-Out Layer:
  circle w0.254: c-5.8,-42.8 r1
  circle w0.2: c25.5,-28 r1.5
  circle w0.2: c-25.5,-28 r1.5
  circle w0.2: c25.5,22 r1.5
  circle w0.2: c7,0 r1.503
  circle w0.2: c-7,0 r1.503
  circle w0.2: c-25.5,22 r1.5
  lines w0.2: -42.5,-26.4 ccw(c-0.05,-0.055) 42.4,-26.4 ; -37.064,-26.885 ccw(c4.84,9.994) -6.8,-44.6 ; 6.8,-44.6 ccw(c-4.84,9.994) 37.064,-26.885
  lines w0.254: -48.778,28.339 cw(c0.058,3.272) 48.748,28.623 ; -48.75,28.339 -48.75,25.75 -47,24 -32,24 -28.125,20.125 -25.75,17.75 -25.75,-16.9 -25.875,-17.025 -27,-17.025 -30.075,-20.1 -38.5,-20.1 -42.5,-24.1 -42.5,-26.4 ; -37.04,-26.86 -37.6,-26.3 -37.6,-24.7 -36.3,-23.4 -34.4,-23.4 -33.6,-23.4 -30.2,-23.4 -30,-23.6 -28.9,-24.7 -28.9,-28.1 -26.4,-30.6 -24.6,-30.6 -22.25,-28.25 -22.25,-23.5 -22.25,-23 -17.95,-18.7 -16.3,-18.7 -11.6,-18.7 -6.8,-23.5 -6.8,-44.6 ; -5.4,52.9 -3,50.5 -3,32.7 -5.2,30.5 -40.5,30.5 -40.5,32.207 -40.5,32.207 cw(c4.87,-4.636) -5.4,52.9 ; 5.4,52.9 3,50.5 3,32.7 5.2,30.5 40.5,30.5 40.5,32.207 ; 5.4,52.9 cw(c-4.87,-4.636) 40.5,32.207 ; 6.8,-44.6 6.8,-23.5 11.6,-18.7 16.3,-18.7 17.95,-18.7 22.25,-23 22.25,-23.5 22.25,-28.25 24.6,-30.6 26.4,-30.6 28.9,-28.1 28.9,-24.7 30,-23.6 30.2,-23.4 33.6,-23.4 34.4,-23.4 36.3,-23.4 37.6,-24.7 37.6,-26.3 37.04,-26.86 ; 42.5,-26.4 42.5,-24.1 38.5,-20.1 30.075,-20.1 27,-17.025 25.875,-17.025 25.75,-16.9 25.75,16.75 25.75,17.75 28.125,20.125 32,24 47,24 48.75,25.75 48.75,28.623 ; 40.5,32.207 40.5,32.207 ; -22.15,-12.975 -22.15,-10.05 -22.15,-5.35 -19.7,-2.9 -14.2,-2.9 -10.7,-6.4 -7,-10.1 -7,-13.8 -9.325,-16.125 -19,-16.125 -22.15,-12.975 ; 7,-13.8 7,-10.1 10.7,-6.4 14.2,-2.9 19.7,-2.9 22.15,-5.35 22.15,-10.05 22.15,-12.975 19,-16.125 9.325,-16.125 7,-13.8

## Other copper
Top Layer:
  rectangle net 3V3: 7,6.6 7.4,7
  region net GND: -1.7,-39.225 -1.725,-39.25 -1.725,-42 -0.1,-42 0.075,-42.175 0.075,-44.2 0.675,-44.2 1.925,-42.95 1.925,-39.225
  region net 7V4: -3.675,-44.275 -1.45,-44.275 -1.425,-44.25 -1.425,-43.425 -2.35,-42.5 -2.35,-39.2 -3.675,-39.2
Bottom Layer:
  region net GND: 1.3,-35.3 2.7,-34.8 3.6,-34.4 4.1,-34.6 4.1,-34.8 4.47,-35.17 4.3,-35.567 3.9,-36.9 3.7,-36.9

## Dimensions
0,58.3 to -0.05,-50.128 on Keep-Out Layer
-48.75,28.339 to 48.75,28.623 on Keep-Out Layer